# EAGLE board headset_v1 (EAGLE 9.5.1)
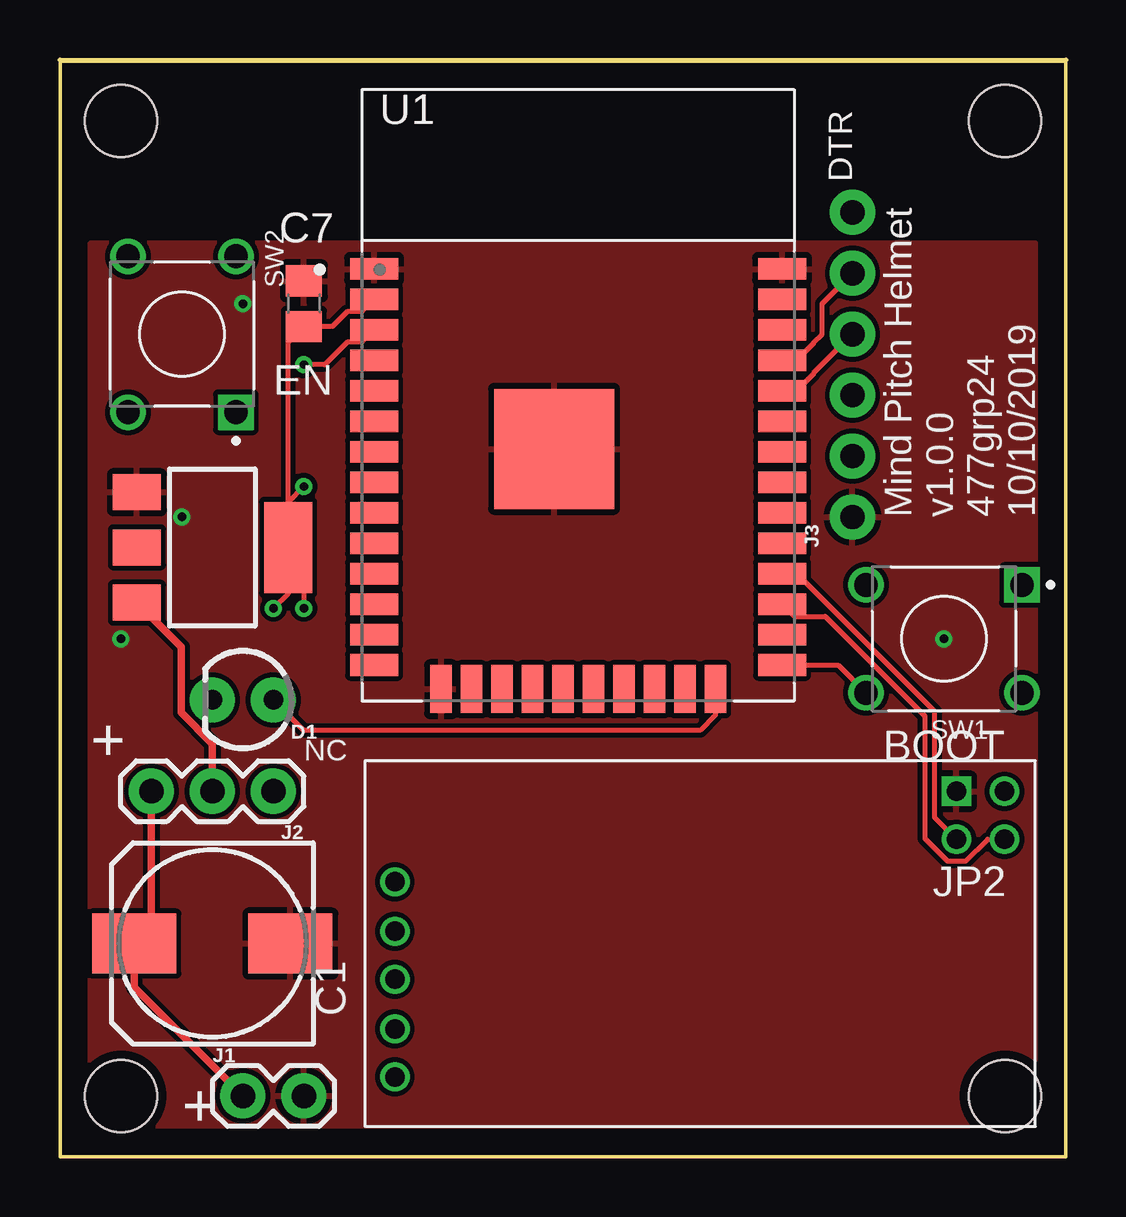
[diagram p0: board, top side]
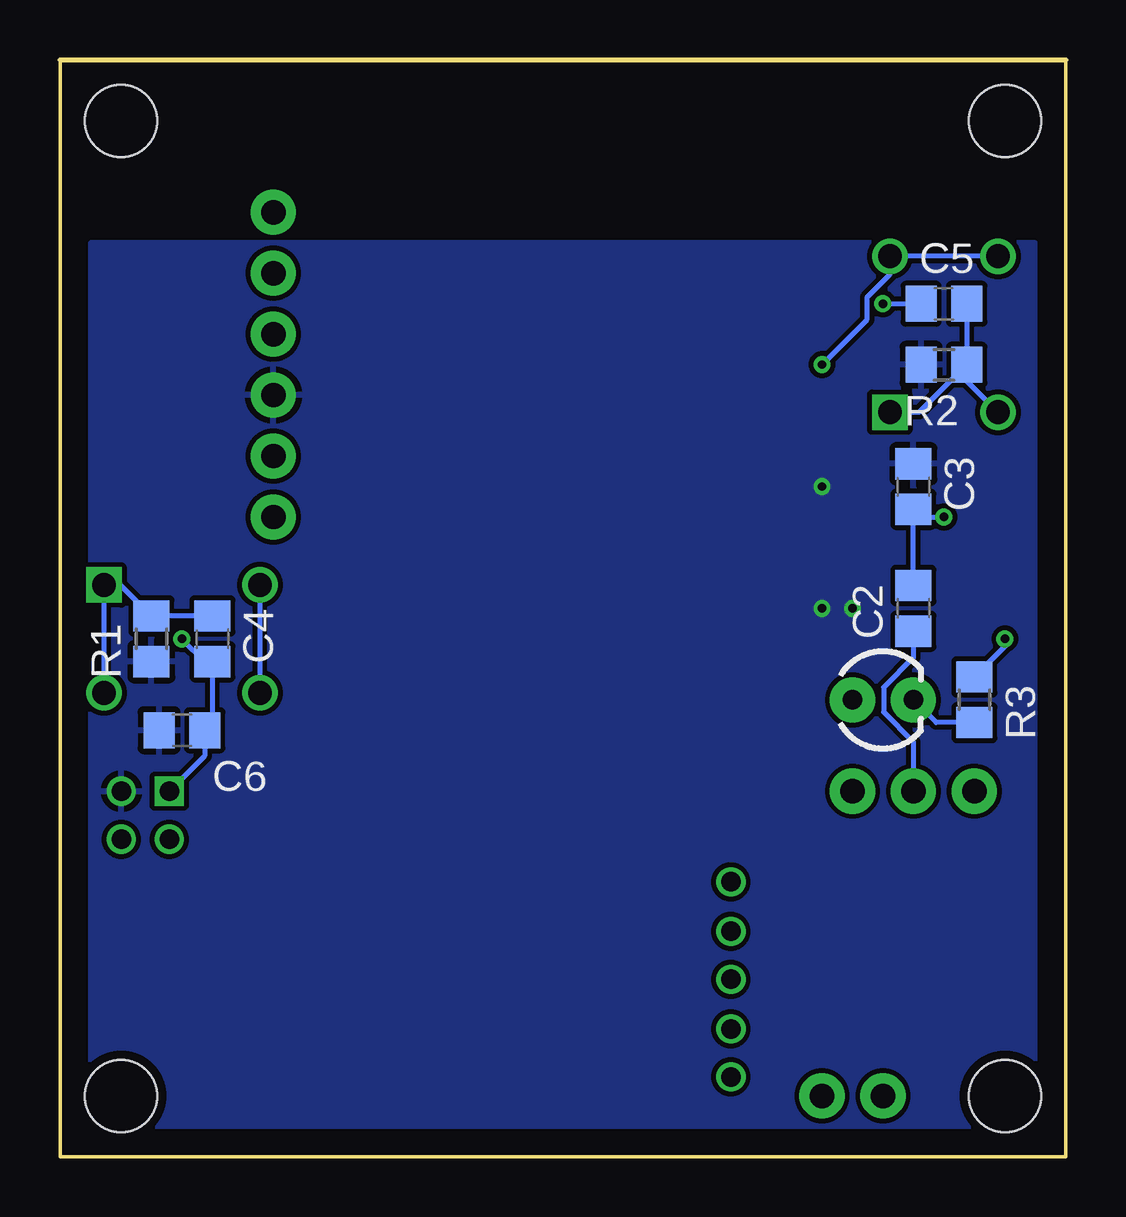
[diagram p1: board, bottom side, seen from below]

Size 41.91 x 45.72 mm. Coordinates in mm from the lower left corner, seen from the top.
Outline: 0,0 0,45.72 41.91,45.72 41.91,0 0,0
Copper layers (1*16): Top 0.0356mm / dielectric 1.5011mm / Bottom 0.0356mm
Design rules "ECE_Senior_Design": minimum track width 8mil, minimum drill 13mil, track to track 8mil, track to pad 8mil, pad to pad 6mil, via to via 8mil, smd to smd 6mil, copper to edge 15mil, drill to drill 8mil, minimum pad ring 7mil, minimum via ring 7mil, stop-mask expansion 3mil, vias tented up to drill 0mil, thermal gap 10mil
Holes 3 mm at 2.54,43.18 39.37,43.18 2.54,2.54 39.37,2.54

## Footprints (pad centres in the part's own frame; a part is rotated, then mirrored left to right if it is on the bottom)
153CLV-0810 = smd 3.5 x 2.5: + 3.25,0; - -3.25,0
C0805 = smd 1.3 x 1.5: 1 -0.95,0; 2 0.95,0
LED_3MM = drill 0.813 pad 1.88: A -1.27,0; K 1.27,0
SOT223 = smd 1.5 x 2: 1 -2.3,-3.15; 2 0,-3.15; 3 2.3,-3.15 | smd 3.8 x 2: 4 0,3.15
1X02 = drill 1.016 pad 1.88: 1 0,0; 2 2.54,0
1X03 = drill 1.016 pad 1.88: 1 0,0; 2 2.54,0; 3 5.08,0
1X06_NO_SILK = drill 1.016 pad 1.88: 1 0,0; 2 2.54,0; 3 5.08,0; 4 7.62,0; 5 10.16,0; 6 12.7,0
B2B-PH-K-S = drill 0.813 square: 1 11.954,6.35 | drill 0.813: 2 13.954,6.35; 3 11.954,4.35; 4 13.954,4.35; 5 -11.446,-3.556; 6 -11.446,-5.556; 7 -11.446,0.508; 8 -11.446,-1.492; 10 -11.446,2.572
R0805 = smd 1.3 x 1.5: 1 -0.95,0; 2 0.95,0
1825910-6 = drill 0.99 square: 1 3.25,2.25 | drill 0.99: 2 3.25,-2.25; 3 -3.25,2.25; 4 -3.25,-2.25
MODULE_ESP32-WROOM-32D = smd 2 x 0.9: 1 -8.5,5.26; 2 -8.5,3.99; 3 -8.5,2.72; 4 -8.5,1.45; 5 -8.5,0.18; 6 -8.5,-1.09; 7 -8.5,-2.36; 8 -8.5,-3.63; 9 -8.5,-4.9; 10 -8.5,-6.17; 11 -8.5,-7.44; 12 -8.5,-8.71; 13 -8.5,-9.98; 14 -8.5,-11.25; 25 8.5,-11.25; 26 8.5,-9.98; 27 8.5,-8.71; 28 8.5,-7.44; 29 8.5,-6.17; 30 8.5,-4.9; 31 8.5,-3.63; 32 8.5,-2.36; 33 8.5,-1.09; 34 8.5,0.18; 35 8.5,1.45; 36 8.5,2.72; 37 8.5,3.99; 38 8.5,5.26 | smd 0.9 x 2: 15 -5.715,-12.25; 16 -4.445,-12.25; 17 -3.175,-12.25; 18 -1.905,-12.25; 19 -0.635,-12.25; 20 0.635,-12.25; 21 1.905,-12.25; 22 3.175,-12.25; 23 4.445,-12.25; 24 5.715,-12.25 | smd 5 x 5: 39 -1,-2.24

## Placement (x,y rotation side)
C1  100u  [153CLV-0810]  6.35,8.89 180 top
C2  100n  [C0805]  6.35,22.86 90 bottom
C3  10u  [C0805]  6.35,27.94 270 bottom
C4  10u  [C0805]  35.56,21.59 270 bottom
C5  10u  [C0805]  5.08,35.56 180 bottom
C6  10u  [C0805]  36.83,17.78 0 bottom
C7  10u  [C0805]  10.16,35.56 90 top
D1  [LED_3MM]  7.62,19.05 180 top
IC1  LD117AS33TR  [SOT223]  6.35,25.4 270 top
J1  [1X02]  7.62,2.54 0 top
J2  [1X03]  8.89,15.24 180 top
J3  [1X06_NO_SILK]  33.02,26.67 90 top
JP2  2PIN  [B2B-PH-K-S]  25.4,8.89 0 top
R1  10k  [R0805]  38.1,21.59 270 bottom
R2  10k  [R0805]  5.08,33.02 180 bottom
R3  150  [R0805]  3.81,19.05 270 bottom
SW1  1825910-6  [1825910-6]  36.83,21.59 0 top
SW2  1825910-6  [1825910-6]  5.08,34.29 270 top
U1  ESP32-WROOM-32D  [MODULE_ESP32-WROOM-32D]  21.59,31.75 0 top

## Library data of the parts
C1 = rcl; SPICEPREFIX: C
C2-C7 = resistor
D1 = SparkFun-LED; PROD_ID: DIO-08794
IC1 = v-reg
J1 J2 = SparkFun-Connectors
J3 = SparkFun-Connectors; PROD_ID: CONN-08437
JP2 = jst_eph
R1-R3 = rcl; SPICEPREFIX: R
SW1 SW2 = Switch; CREATED_BY: PCBLayout.com; DIGIKEY_PART_NUMBER: 450-1650-ND; MANUFACTURER: TE Connectivity ALCOSWITCH Switches; MPN: 1825910-6
U1 = ESP32-WROOM-32D; AVAILABILITY: Unavailable; DESCRIPTION: IC: SoC; GPIO, I2C, I2S, IR, SD, SDIO, SPI, UART; 2.7÷3.6VDC; 20dBm; MF: Espressif Systems; MP: ESP32-WROOM-32D; PACKAGE: Module Espressif Systems; PRICE: None

## Nets
3V3: C3.1 C6.1 C7.1 IC1.4 J3.3 JP2.2 R1.2 R2.2 U1.2
4V5: C1.+ J1.1 J2.3
GND: C1.- C2.2 C3.2 C4.2 C5.2 C6.2 C7.2 IC1.1 J1.2 J3.1 JP2.1 R3.1 U1.1 U1.15 U1.38 U1.39
N$1: J3.5 U1.35
N$2: J3.4 U1.34
N$3: C2.1 IC1.3 J2.2
N$4: D1.A U1.24
N$5: JP2.3 U1.28
N$6: JP2.4 U1.27
N$7: C4.1 R1.1 SW1.1 SW1.2
N$8: SW1.3 SW1.4 U1.25
N$9: D1.K R3.2
N$10: SW2.3 SW2.4 U1.3
N$12: C5.1 R2.1 SW2.1 SW2.2

## Tracks (layer width: path | path; a pad name or v marks a point on that pad's centre or on a via)
3V3  (via drill 0.35)
  Top 0.203: U1.2 12.57,35.23 11.96,35.23 11.35,34.61 C7.1 9.5,33.95 IC1.4 | IC1.4 9.5,27.28 v10.16,27.94 | IC1.4 10.16,24.74 v10.16,22.86 | IC1.4 9.5,23.47 v8.89,22.86
  pour Bottom: 1.27,38.1 40.64,38.1 40.64,1.27 1.27,1.27
4V5
  Top 0.305: J1.1 3.1,7.06 C1.+ 3.81,9.6 J2.3
GND  (via drill 0.35)
  Bottom 0.203: JP2.1 35.88,16.71 C6.2 35.56,18.1 C4.2 35.88,20.64 v36.83,21.59 | v7.62,35.56 C5.2 | C2.2 C3.2 6.03,26.67 v5.08,26.67 | R3.1 2.54,21.27 v2.54,21.59
  pour Top: 1.27,38.1 40.64,38.1 40.64,1.27 1.27,1.27
N$1
  Top 0.203: U1.35 30.7,33.2 31.39,33.89 31.39,33.94 31.75,34.29 31.75,35.56 J3.5
N$2
  Top 0.203: J3.4 31.39,32.66 31.39,32.62 30.7,31.93 U1.34
N$3
  Top 0.305: IC1.3 5.05,21.25 5.05,18.51 6.35,17.22 J2.2
  Bottom 0.203: C2.1 6.35,20.81 7.59,19.57 7.59,18.53 6.35,17.29 J2.2
N$4
  Top 0.203: U1.24 27.3,18.41 26.67,17.78 10.16,17.78 D1.A
N$5
  Top 0.203: JP2.3 36.44,14.15 36.44,18.57 30.7,24.31 U1.28
N$6
  Top 0.203: U1.27 30.61,22.52 31.88,22.52 36.03,18.37 36.03,13.27 36.98,12.33 37.73,12.33 38.65,13.24 JP2.4
N$7
  Bottom 0.203: C4.1 R1.1 39.4,23.84 SW1.1 SW1.2
N$8
  Top 0.203: U1.25 32.42,20.5 SW1.4
  Bottom 0.203: SW1.3 SW1.4
N$9
  Bottom 0.203: R3.2 5.4,18.1 D1.K
N$10  (via drill 0.35)
  Top 0.203: U1.3 12.57,33.95 11.96,33.95 11.03,33.02 v10.16,33.02
  Bottom 0.203: SW2.4 SW2.3 7.33,36.78 8.28,35.83 8.28,34.9 v10.16,33.02
N$12
  Bottom 0.203: SW2.1 6.11,31.04 R2.1 | SW2.2 4.13,32.34 R2.1 | C5.1 R2.1

## Text on the board
tNames: DTR | EN | Mind Pitch Helmet / v1.0.0 / 477grp24 / 10/10/2019 | + | NC | BOOT | +